# EAGLE board test (EAGLE 6.5.0)
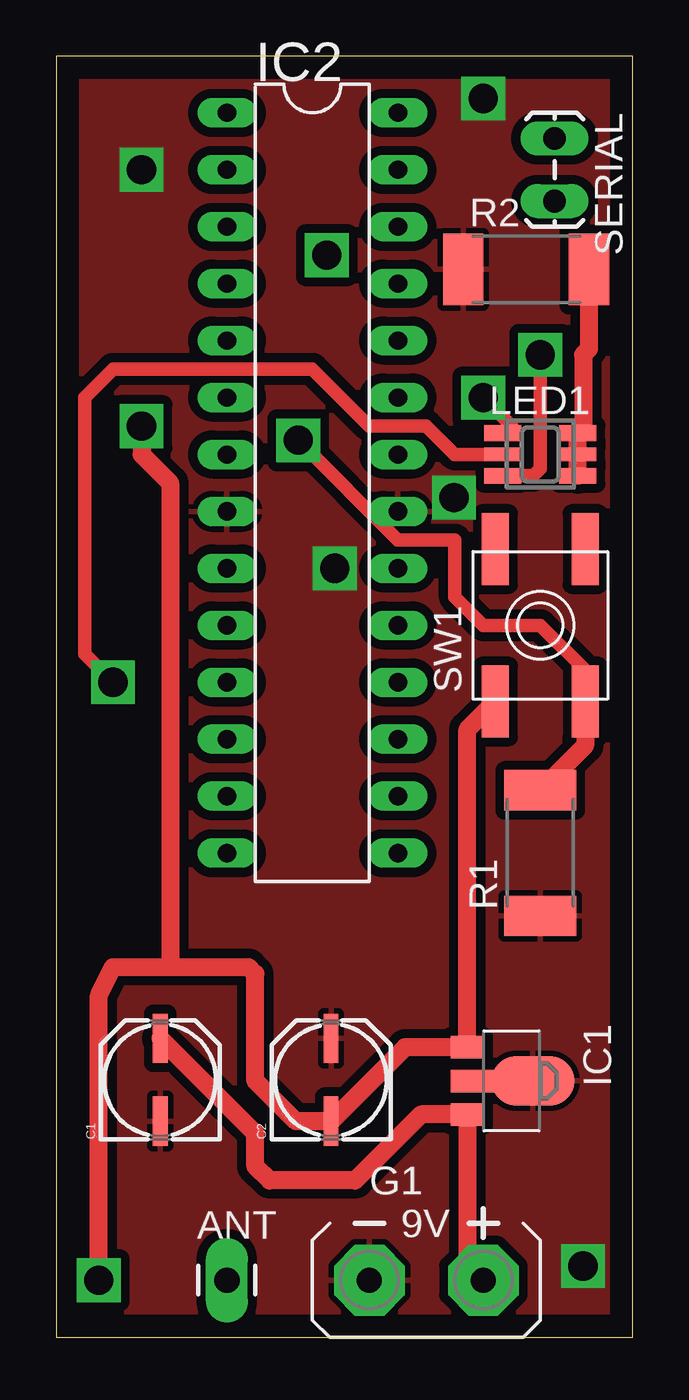
[diagram p0: board, top side]
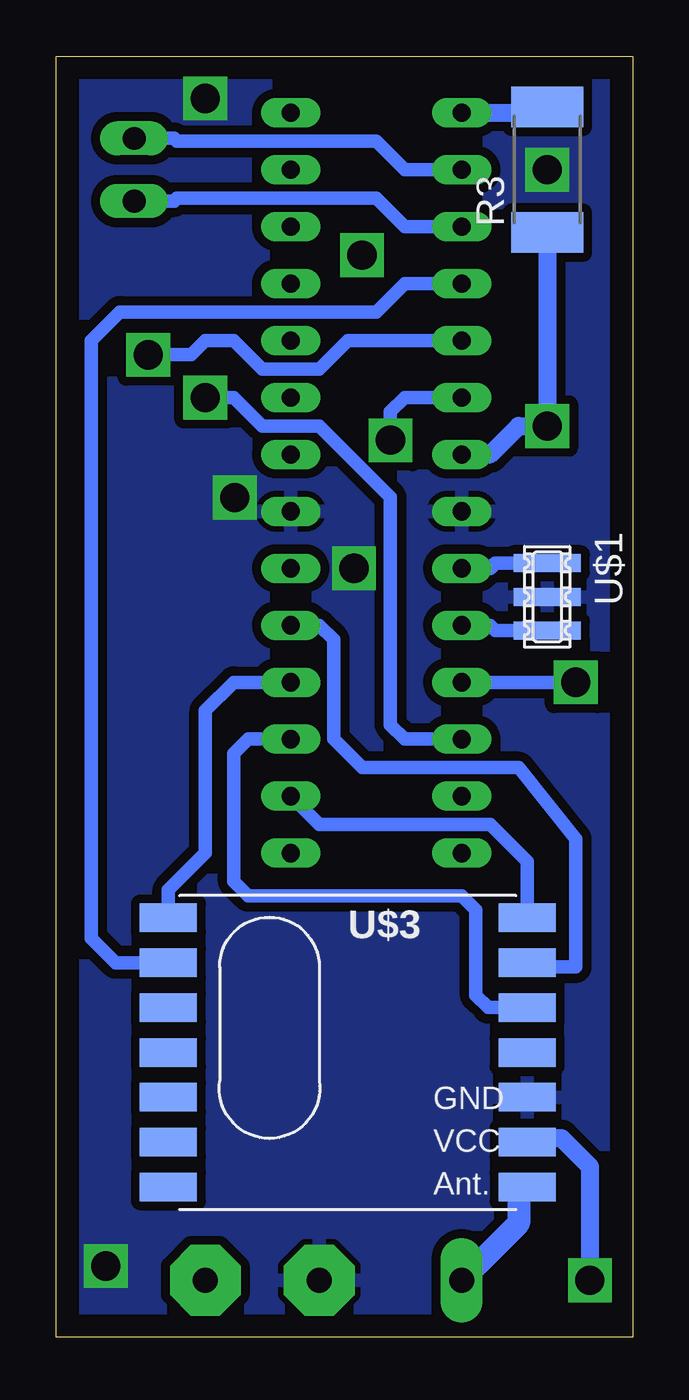
[diagram p1: board, bottom side, seen from below]

Size 25.7 x 57.14 mm. Coordinates in mm from the lower left corner, seen from the top.
Outline: 0,0 25.7,0 25.7,57.14 0,57.14 0,0
Copper layers (1*16): Top 0.035mm / dielectric 1.5mm / Bottom 0.035mm
Design rules "default": minimum track width 10mil, minimum drill 24mil, track to track 8mil, track to pad 8mil, pad to pad 8mil, via to via 8mil, smd to smd 8mil, copper to edge 40mil, drill to drill 8mil, minimum pad ring 10mil, minimum via ring 8mil, stop-mask expansion 4mil, vias tented up to drill 0mil, thermal gap 10mil

## Footprints (pad centres in the part's own frame; a part is rotated, then mirrored left to right if it is on the bottom)
1X01_LONGPAD = drill 1.118 pad 1.88 long: 1 0,0
PANASONIC_C = smd 2.2 x 0.65: + 1.9,-0.2; - -1.8,-0.2
AB9V = drill 1.118 pad 3.15 octagon: + 0,2.54; - 0,-2.54
SOT89 = smd 1 x 1.5: 1 -1.499,-1.981; 3 1.499,-1.981 | smd 1 x 2: 2 0,-1.727 | smd 2.2 x 3.7: 2@1 0,0.94
DIL28-3 = drill 0.813 long: 1 -16.51,-3.81; 2 -13.97,-3.81; 3 -11.43,-3.81; 4 -8.89,-3.81; 5 -6.35,-3.81; 6 -3.81,-3.81; 7 -1.27,-3.81; 8 1.27,-3.81; 9 3.81,-3.81; 10 6.35,-3.81; 11 8.89,-3.81; 12 11.43,-3.81; 13 13.97,-3.81; 14 16.51,-3.81; 15 16.51,3.81; 16 13.97,3.81; 17 11.43,3.81; 18 8.89,3.81; 19 6.35,3.81; 20 3.81,3.81; 21 1.27,3.81; 22 -1.27,3.81; 23 -3.81,3.81; 24 -6.35,3.81; 25 -8.89,3.81; 26 -11.43,3.81; 27 -13.97,3.81; 28 -16.51,3.81
GM5WA94310A = smd 0.7 x 1.65: 1 -0.95,-1.675; 3 0.95,-1.675; 4 0.95,1.675; 6 -0.95,1.675 | smd 0.6 x 1.65: 2 0,-1.675; 5 0,1.675
R2512 = smd 1.8 x 3.2: 1 -2.8,0; 2 2.8,0
1X02_LOCK_LONGPADS = drill 1.016 long: 1 -0.127,0; 2 2.667,0
EVQ-Q2 = smd 3.2 x 1.2: A -3.4,-2; A' 3.4,-2; B -3.4,2; B' 3.4,2
CSTCR-G = smd 0.8 x 3: 1 -1.5,0; 2 0,0; 3 1.5,0
RFM12B = smd 2.54 x 1.27: ANT 8,-6; FFS -8,2; GND 8,-2; IRQ -8,4; P$8 -8,0; P$9 -8,-2; P$10 -8,-4; P$12 -8,-6; P$16 8,0; SCK 8,4; SDI 8,2; SDO -8,6; SEL 8,6; VDD 8,-4

## Placement (x,y rotation side)
ANT  M01PTH_LONGPAD  [1X01_LONGPAD]  7.62,2.54 0 top
C1  [PANASONIC_C]  4.45,11.43 90 top
C2  [PANASONIC_C]  12.06,11.43 90 top
G1  AB9V  [AB9V]  16.51,2.54 270 top
IC1  78L05F  [SOT89]  20.32,11.43 270 top
IC2  ATMEGA168-20P  [DIL28-3]  11.43,38.1 270 top
LED1  GM5WA94310A  [GM5WA94310A]  21.59,39.37 270 top
R1  10k  [R2512]  21.59,21.59 90 top
R2  230  [R2512]  20.95,47.62 0 top
R3  10k  [R2512]  3.81,52.07 90 bottom
SERIAL  [1X02_LOCK_LONGPADS]  22.23,53.34 270 top
SW1  SPST_TACT-EVQQ2  [EVQ-Q2]  21.59,31.75 90 top
U$1  [CSTCR-G]  3.81,33.02 270 bottom
U$3  RFM12B  [RFM12B]  12.7,12.7 0 bottom

## Library data of the parts
ANT C1 C2 R1-R3 SERIAL = SparkFun
G1 = battery
IC1 = linear
IC2 SW1 U$1 = adafruit
LED1 = led
U$3 = JeeParts

## Nets
5V: C2.- IC1.1 IC2.7 R3.1 SW1.B U$3.VDD
GND: C1.- C2.+ G1.- IC1.2@1 IC2.8 IC2.21 R1.1 R2.1 U$1.2 U$3.GND
N$1: LED1.4 LED1.5 LED1.6 R2.2
N$2: IC2.9 U$1.1
N$3: IC2.4 U$3.IRQ
N$4: IC2.16 U$3.SEL
N$5: IC2.19 U$3.SCK
N$6: IC2.17 U$3.SDI
N$7: IC2.3 SERIAL.2
N$8: IC2.11 LED1.2
N$9: IC2.5 LED1.3
N$11: IC2.2 SERIAL.1
N$12: IC2.12 LED1.1
N$13: IC2.10 U$1.3
N$14: IC2.18 U$3.SDO
N$15: IC2.6 R1.2 SW1.A
N$16: ANT.1 U$3.ANT
N$30: IC2.1 R3.2
VCCBAT: C1.+ G1.+ IC1.3

## Tracks (layer width: path | path; a pad name or v marks a point on that pad's centre or on a via)
5V  (via drill 0.6, 1, 1.3)
  Top 0.813: v1.91,2.54 1.91,15.24 2.54,16.51 5.08,16.51 | 5.08,16.51 8.59,16.51 8.89,16.2 8.89,11.43 10.69,9.63 C2.- 15.56,12.93 IC1.1 18.34,27.1 SW1.B | v3.81,40.64 3.81,39.37 5.08,38.1 5.08,16.51
  Bottom 0.813: U$3.VDD 4.89,8.7 5.08,8.89 3.17,8.89 1.91,7.62 v1.91,2.54 | R3.1 v3.81,40.64 5.08,40.64 6.35,39.37 IC2.7
GND  (via drill 1.3)
  other vias: 3.81,52.07 19.05,55.24 23.5,3.17 17.74,37.45 12.42,34.29
  pour Top (isolate 0.406): 0,0 0,57.15 25.4,57.15 25.4,0
  pour Bottom (isolate 0.406): 0,0 0,57.15 25.4,57.15 25.4,0
N$1
  Top 0.813: LED1.4 LED1.5 LED1.6 23.5,40.55 23.5,43.81 23.75,44.08 R2.2
N$2
  Bottom 0.61: IC2.9 6.35,34.29 6.12,34.52 U$1.1
N$3
  Bottom 0.61: U$3.IRQ 23.05,16.7 24.13,17.78 24.13,44.45 22.86,45.72 11.43,45.72 10.16,46.99 IC2.4
N$4
  Bottom 0.61: U$3.SEL 4.7,21.21 6.35,22.86 13.97,22.86 IC2.16
N$5
  Bottom 0.61: U$3.SCK 4.89,16.7 5.08,16.51 2.54,16.51 2.54,22.23 5.08,25.4 12.06,25.4 13.34,26.67 13.34,31.11 13.97,31.75 IC2.19
N$6
  Bottom 0.61: U$3.SDI 6.45,14.7 6.99,15.24 6.99,19.05 7.62,19.68 17.14,19.68 17.78,20.32 17.78,26.04 17.14,26.67 IC2.17
N$7
  Bottom 0.61: SERIAL.2 20.45,50.67 20.32,50.8 11.43,50.8 10.16,49.53 IC2.3
N$8  (via drill 0.6, 1, 1.3)
  Top 0.61: LED1.2 17.78,39.37 16.51,40.64 13.97,40.64 11.43,43.18 2.54,43.18 1.27,41.91 1.27,30.48 v2.54,29.21
  Bottom 0.61: v2.54,29.21 IC2.11
N$9  (via drill 1.3)
  Top 0.61: LED1.3 21.27,38.42 21.59,38.73 v21.59,43.81
  Bottom 0.61: IC2.5 12.7,44.45 13.97,43.18 16.51,43.18 17.78,44.45 19.05,44.45 19.68,43.81 v21.59,43.81
N$11
  Bottom 0.61: SERIAL.1 20.45,53.47 20.32,53.34 11.43,53.34 10.16,52.07 IC2.2
N$12  (via drill 1.3)
  Top 0: LED1.1 20,40.32 20.32,40.64
  Top 0.61: 20.32,40.64 v19.05,41.91
  Bottom 0.61: v19.05,41.91 17.78,41.91 16.51,40.64 13.97,40.64 10.79,37.47 10.79,27.3 10.16,26.67 IC2.12
N$13
  Bottom 0.61: U$1.3 6.12,31.52 6.35,31.75 IC2.10
N$14
  Bottom 0.61: U$3.SDO 20.7,19.94 19.05,21.59 19.05,27.94 17.78,29.21 IC2.18
N$15  (via drill 1.3)
  Top 0.61: SW1.A 23.59,29.75 21.59,31.75 19.05,31.75 17.78,33.02 17.78,35.56 15.24,35.56 v10.79,40.01
  Top 0.813: SW1.A 23.59,26.39 R1.2
  Bottom 0.61: IC2.6 10.16,41.91 10.79,41.27 v10.79,40.01
N$16
  Bottom 0.61: U$3.ANT 4.73,6.7 5.08,6.35
  Bottom 1.016: 5.08,6.35 5.08,5.08 ANT.1
N$20  (via drill 1.3)
  other vias: 12.06,48.26
N$30
  Bottom 0.813: 3.81,54.61 R3.2 4.07,54.61 IC2.1
VCCBAT
  Top 0.813: C1.+ 8.89,9.09 8.89,7.62 9.53,6.99 13.34,6.99 16.28,9.93 IC1.3 18.34,3.25 G1.+